# Altium PCB Board_USB_powered.PcbDoc
Units mm, origin at the board's own origin, x right, y up, seen from the top; angles counter-clockwise.
Board outline 55.5 x 44.32 mm, 4 copper layers (Top Layer, Layer 1, Layer 2, Bottom Layer), stack 1.586 mm thick; 45 components, 35 nets, 182 pads, 111 vias.
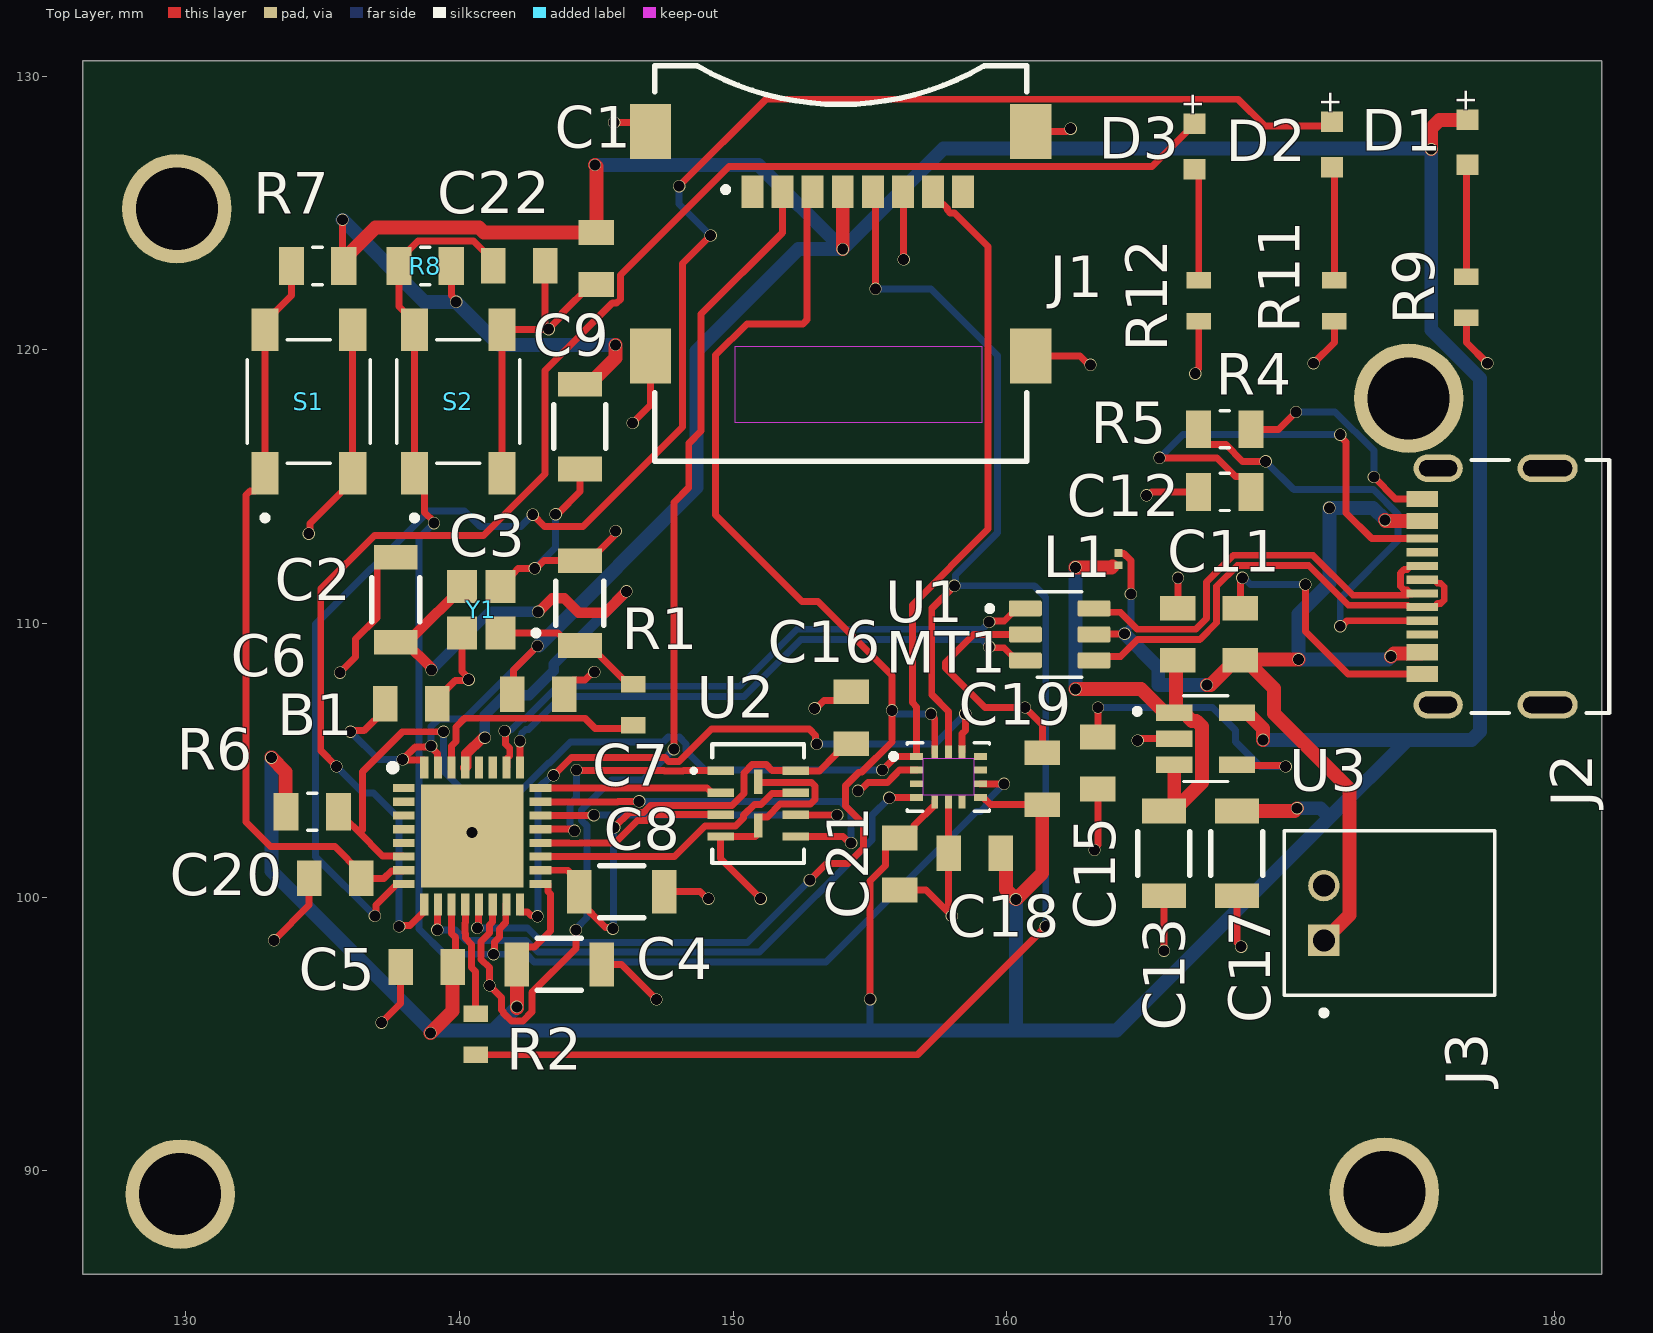
[diagram p0: Top Layer view]
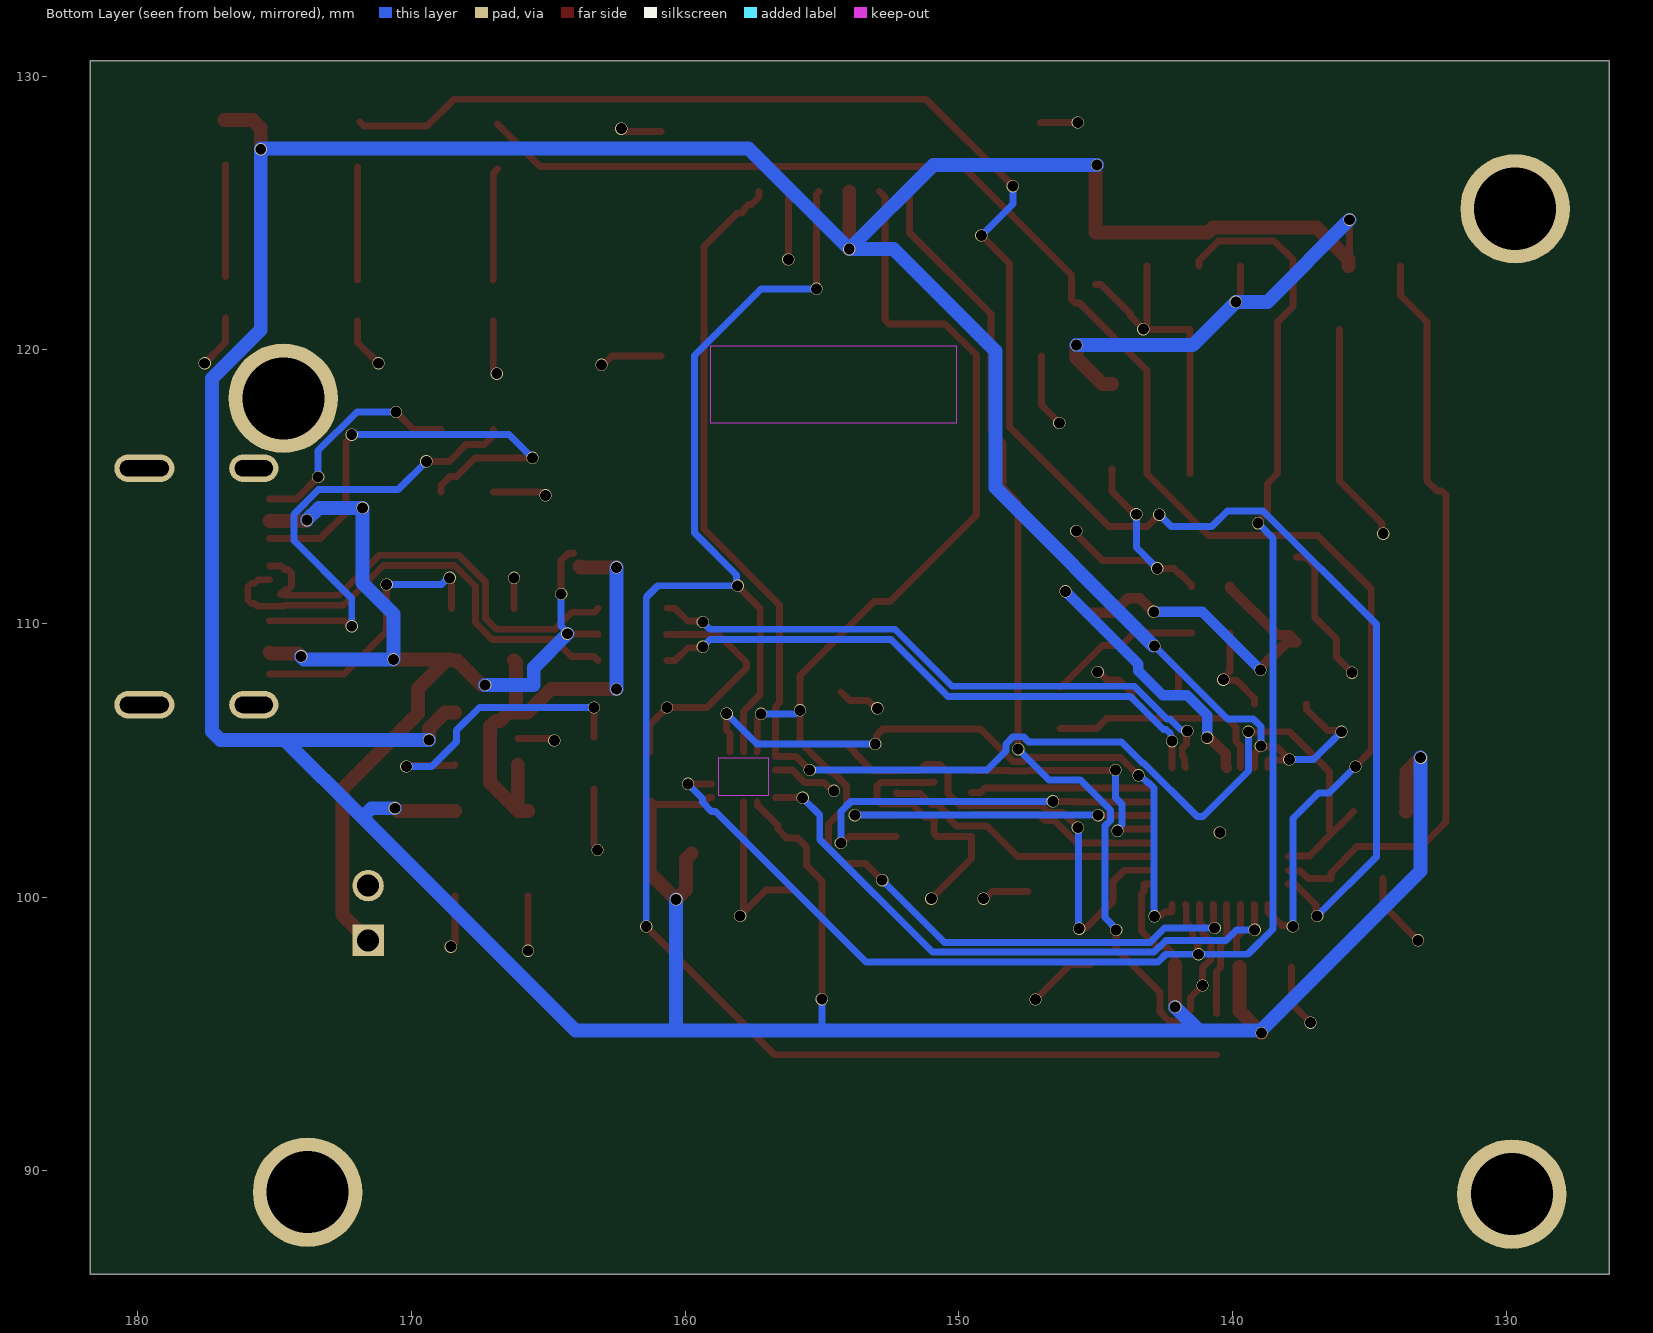
[diagram p1: Bottom Layer view, seen from below]
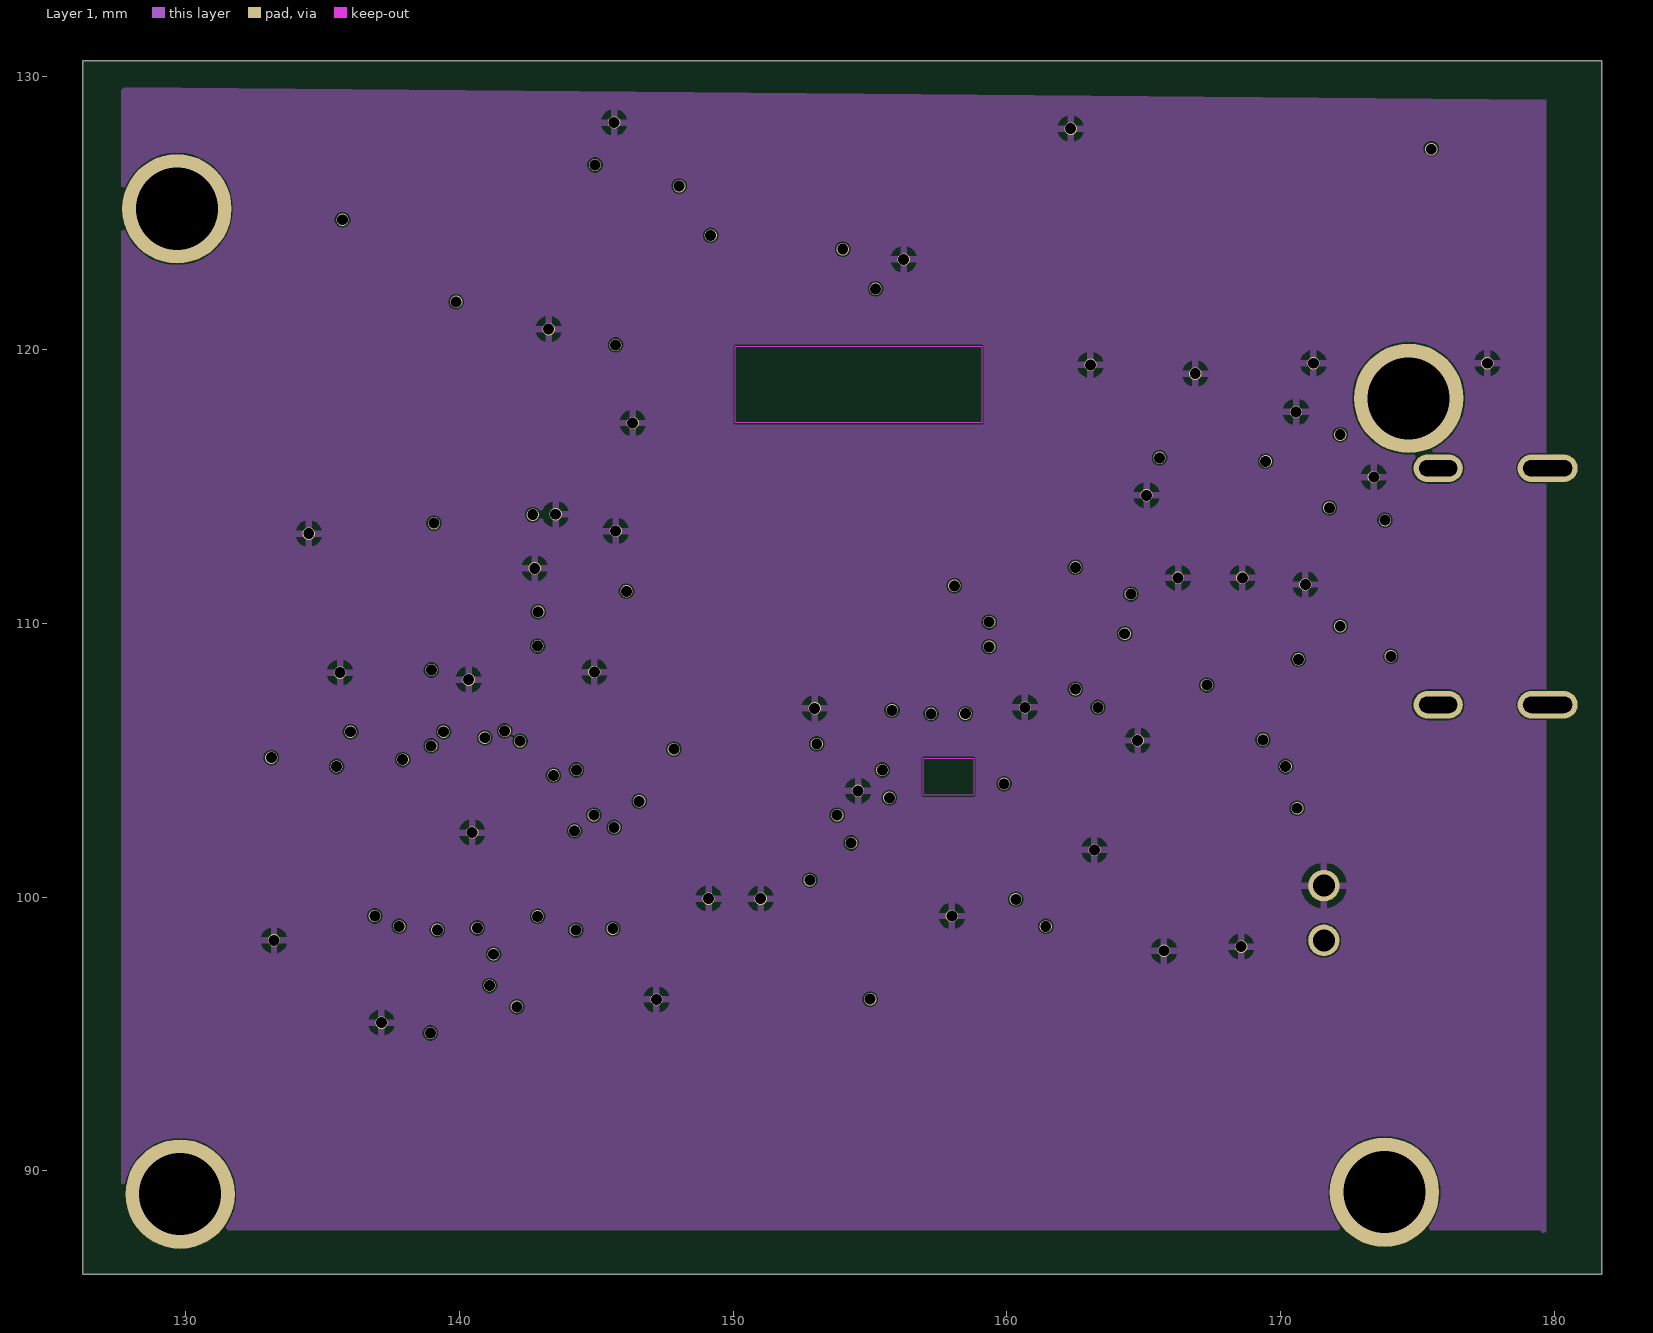
[diagram p2: Layer 1]
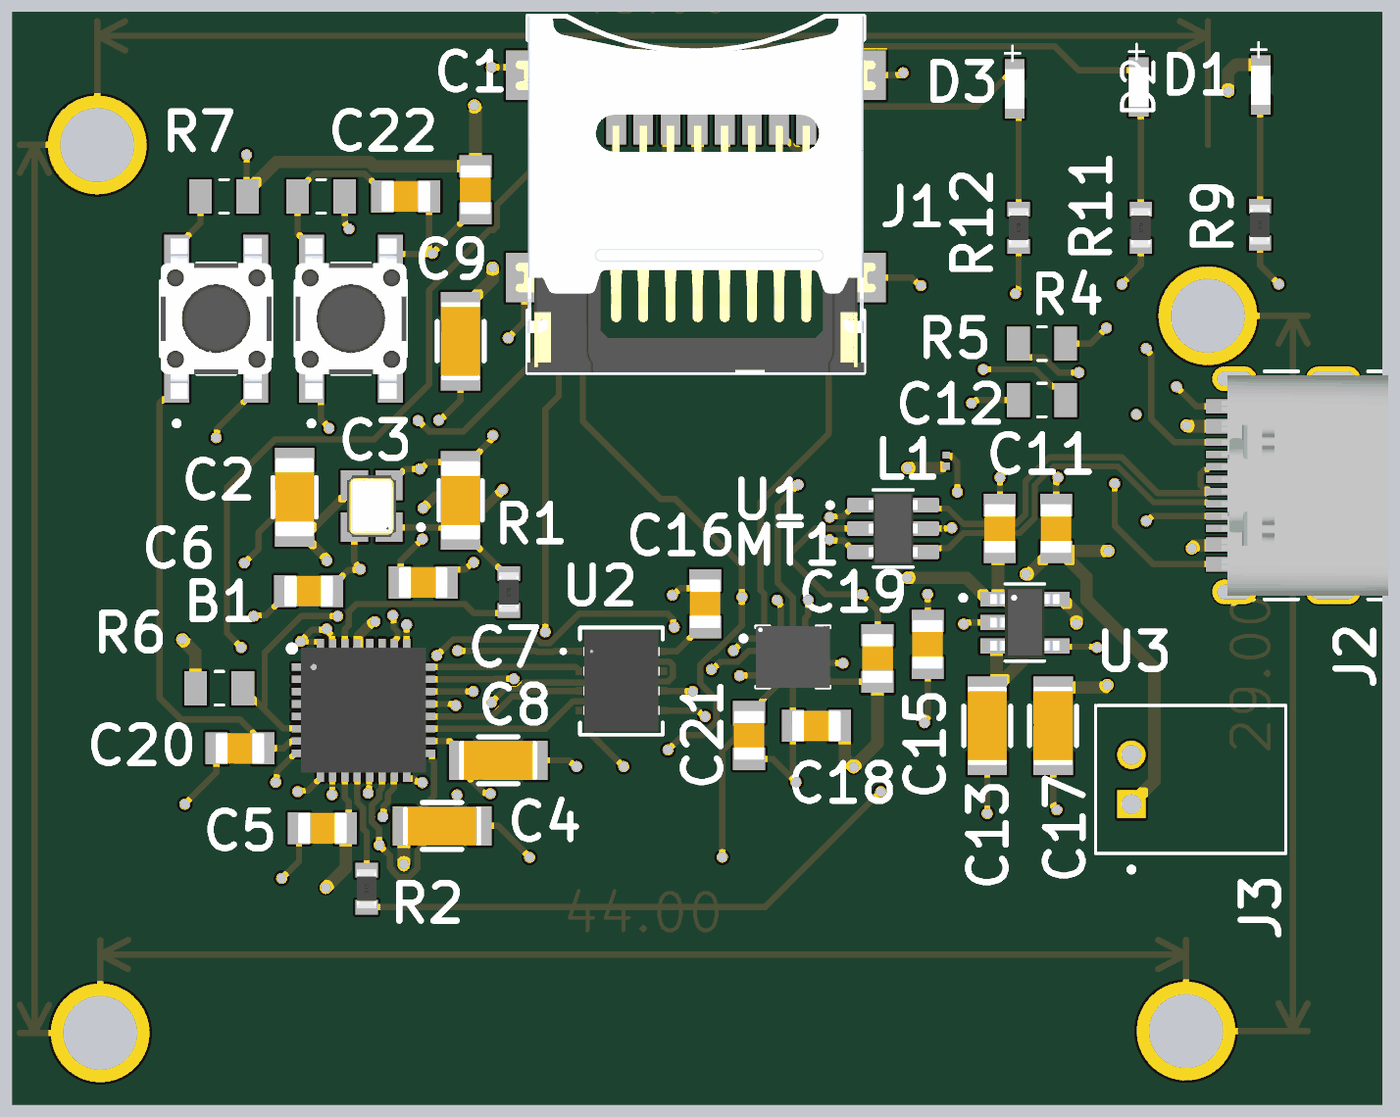
[diagram p3: 3D render of the assembled board from above, using the file's embedded part models]

## Layer stack, top to bottom
Top Solder: solder mask 0.0102, Solder Resist, Dk 3.5
Top Layer: signal copper 0.035
Dielectric 2: prepreg 0.2104, PP-006, Dk 4.4
Layer 1: signal copper 0.0152
Dielectric 1: dielectric 1.065, FR-4, Dk 4.4
Layer 2: signal copper 0.0152
Dielectric 3: prepreg 0.2104, PP-006, Dk 4.4
Bottom Layer: signal copper 0.035
Bottom Solder: solder mask 0.0102, Solder Resist, Dk 3.5

## Board outline
126.238,86.233 181.737,86.233 181.737,130.556 126.238,130.556

## Design rules (kind name [scope] priority, off if disabled: settings)
Clearance [All] p1: gap=0.05 ignorepadtopadclearanceinfootprint=TRUE
DiffPairsRouting [All] p1: maxlimit=0.254 minlimit=0.127 mostfreqgap=0.254 toplayer_maxgap=0.127 toplayer_prefgap=0.127 toplayer_minwidth=0.244 toplayer_maxwidth=0.244 toplayer_prefwidth=0.244 bottomlayer_maxgap=0.127 bottomlayer_prefgap=0.127 bottomlayer_minwidth=0.244 bottomlayer_maxwidth=0.244 bottomlayer_prefwidth=0.244 impedanceprofiledriven=TRUE impedanceprofileid={073ED901-ED6F-4E1C-9FA9-E3A75C1DBC98} impedanceprofilevalue=90.000000 maxuncoupledlength=12.7
PolygonConnect [All] p1: connectstyle=Relief reliefconductorwidth=0.254 reliefentries=4 polygonreliefangle="90 Angle" airgapwidth=0.254
RoutingVias [All] p1: holewidth=0.4 width=0.45 viastyle="Through Hole" minholewidth=0.4 minwidth=0.45 maxholewidth=0.6 maxwidth=1
SolderMaskExpansion [All] p1: expansion=0.102 istentingtop=FALSE
SupplyNets "Schematic Supply Nets_4" [InNet('+VBUS FILT')] p1: voltage=0.000
SupplyNets "Schematic Supply Nets_3" [InNet('+VBUS')] p2: voltage=0.000
SupplyNets "Schematic Supply Nets_2" [InNet('+VCC_SPI')] p3: voltage=0.000
SupplyNets "Schematic Supply Nets_1" [InNet('+3V3')] p4: voltage=0.000
SupplyNets "Schematic Supply Nets" [InNet('GND')] p5: voltage=0.000
Width [All] p1: maxlimit=0.508 minlimit=0.127 preferedwidth=0.254
29 further rules are at their usual default settings.

## Classes and differential pairs
differential pair USB_D: +USB_D_P -USB_D_N
differential pair MCU_USB_D: +MCU_USB_D_P -MCU_USB_D_N

## Components (designator, comment, footprint, x,y, rotation, side; value= is the part's Value field where it differs from the comment)
B1 "ESP32-C3" QFN50P500X500X90-33N-D 140.462,102.235 r0 top
C1 "885012207016" WCAP-CSGP_0805_L2W1.25H0.8_Reflow 144.998,123.333 r90 top value=100nF
C2 "885012008037" WCAP-CSGP_1206_L3.2W1.6H0.8 137.668,110.871 r90 top value=10pF
C3 "885012008037" WCAP-CSGP_1206_L3.2W1.6H0.8 144.399,110.744 r90 top value=10pF
C4 "885012208018" WCAP-CSGP_1206_L3.2W1.6H1.6 143.646,97.543 r180 top value=10µF
C5 "885012207016" WCAP-CSGP_0805_L2W1.25H0.8_Reflow 138.8,97.45 r0 top value=100nF
C6 "885012207016" WCAP-CSGP_0805_L2W1.25H0.8_Reflow 138.242,107.061 r180 top value=100nF
C7 "885012207016" WCAP-CSGP_0805_L2W1.25H0.8_Reflow 142.882,107.415 r180 top value=100nF
C8 "885012208018" WCAP-CSGP_1206_L3.2W1.6H1.6 145.923,100.203 r180 top value=10µF
C9 "885012208018" WCAP-CSGP_1206_L3.2W1.6H1.6 144.399,117.195 r90 top value=10µF
C11 "885012207016" WCAP-CSGP_0805_L2W1.25H0.8_Reflow 168.529,109.601 r270 top value=100nF
C12 "885012207016" WCAP-CSGP_0805_L2W1.25H0.8_Reflow 166.243,109.601 r270 top value=100nF
C13 "885012208018" WCAP-CSGP_1206_L3.2W1.6H1.6 165.735,101.6 r90 top value=10µF
C15 "885012207016" WCAP-CSGP_0805_L2W1.25H0.8_Reflow 163.322,104.902 r90 top value=100nF
C16 "885012207016" WCAP-CSGP_0805_L2W1.25H0.8_Reflow 154.305,106.553 r270 top value=100nF
C17 "885012208018" WCAP-CSGP_1206_L3.2W1.6H1.6 168.402,101.6 r270 top value=10µF
C18 "885012207016" WCAP-CSGP_0805_L2W1.25H0.8_Reflow 158.816,101.6 r0 top value=100nF
C19 "885012107012" WCAP-CSGP_0805_L2W1.25H1.25 161.29,104.333 r270 top value=2.2µF
C20 "885012207016" WCAP-CSGP_0805_L2W1.25H0.8_Reflow 135.458,100.692 r0 top value=100nF
C21 "885012007009" WCAP-CSGP_0805_L2W1.25H1.25 156.087,101.212 r90 top value=10nF
C22 "885012207016" WCAP-CSGP_0805_L2W1.25H0.8_Reflow 142.179,123.063 r180 top value=100nF
D1 "150060VS73220" WL-SMCC_0603_L1.6W0.8H0.2 176.825,127.575 r90 top
D2 "150060VS73220" WL-SMCC_0603_L1.6W0.8H0.2 171.875,127.5 r90 top
D3 "150060VS73220" WL-SMCC_0603_L1.6W0.8H0.2 166.85,127.425 r90 top
J1 "MEM2067-02-180-00-A_REVB" GCT_MEM2067-02-180-00-A_REVB 153.924,123.15 r180 top
J2 "2171790001" MOLEX_2171790001 178.6,111.35 r90 top
J3 "440055-2" TE_440055-2 171.577,98.425 r90 top
L1 "MHQ0402PSA2N2BT000" INDC0402X22N 164.075,112.35 r270 top value=2.2nH
MT1 "ICM-42605" XDCR_ICM-42605 157.861,104.394 r0 top
R1 "560112116043" WRIS-RSKS_0603_Reflow 146.35,107.025 r90 top value=22
R2 "560112116043" WRIS-RSKS_0603_Reflow 140.589,94.996 r90 top value=22
R4 "RC0805JR-075K1L" RESC2012X60N 167.955,117.094 r180 top value=5.1k
R5 "RC0805JR-075K1L" RESC2012X60N 167.955,114.808 r0 top value=5.1k
R6 "RC0805JR-075K1L" RESC2012X60N 134.62,103.124 r0 top value=5.1k
R7 "RC0805JR-075K1L" RESC2012X60N 134.813,123.063 r180 top value=5.1k
R8 "RC0805JR-075K1L" RESC2012X60N 138.745,123.063 r0 top value=5.1k
R9 "560112116014" WRIS-RSKS_0603_Reflow 176.784,121.92 r90 top value=1k
R11 "560112116014" WRIS-RSKS_0603_Reflow 171.958,121.793 r90 top value=1k
R12 "560112116014" WRIS-RSKS_0603_Reflow 167.005,121.793 r90 top value=1k
S1 "PTS_647_SM38_SMTR2_LFS" SW_PTS_647_SM38_SMTR2_LFS 134.493,118.11 r90 top
S2 "PTS_647_SM38_SMTR2_LFS" SW_PTS_647_SM38_SMTR2_LFS 139.954,118.11 r90 top
U1 "USBLC6-2SC6" SOT95P280X145-6N 161.925,109.601 r0 top
U2 "W25Q16JVUUIQ TR" USON8_4X3_UU_WIN 150.911,103.419 r0 top
U3 "SPX3819M5-L-3-3" SOT95P280X145-5N 167.259,105.791 r0 top
Y1 "FA-20H_16.0000MF12Z-AC3" XTAL_FA-20H_16.0000MF12Z-AC3 140.791,110.502 r180 top

## Footprints (in the part's own frame and the unit in brackets; to place one, negate y for a bottom-side part, rotate by r counter-clockwise, add the part's x,y. Pads: shape width x height; smd on the part's side, far side on the other; paste and mask are expansions set on the pad)
GCT_MEM2067-02-180-00-A_REVB [mm]
  rect 0.8x1.2 smd: 1(3.225,-2.625) 2(2.125,-2.625) 3(1.025,-2.625) 4(-0.075,-2.625) 5(-1.175,-2.625) 6(-2.275,-2.625) 7(-3.375,-2.625) 8(-4.475,-2.625)
  rect 1.5x2 smd: 9(-6.945,-4.825) 10(-6.945,3.375) 11(6.945,3.375) 12(6.945,-4.825)
  Keep-Out Layer region: 3.85,3.028 -5.155,3.028 -5.155,5.825 3.85,5.825
  silkscreen extent -6.8,-7.22 6.8,7.22, body extent -7.3,-7.22 7.3,7.22, height 1.8
INDC0402X22N [mm]
  rect 0.29x0.3 smd: 1(-0.222,0) 2(0.222,0)
MOLEX_2171790001 [mm]
  rect 0.59x1.15 smd mask+0.064: A1B12(-3.2,3.425) A4B9(-2.4,3.425) B1A12(3.2,3.425) B4A9(2.4,3.425)
  rect 0.298x1.15 smd mask+0.064: A5(-1.25,3.425) A6(-0.25,3.425) A7(0.25,3.425) A8(1.25,3.425) B5(1.75,3.425) B6(0.75,3.425) B7(-0.75,3.425) B8(-1.75,3.425)
  oval 1x2.2 hole 0.6 slot 1.8 at 90 deg mask+0.064: SH1(-4.32,-1.15) SH2(4.32,-1.15)
  oval 1x1.8 hole 0.6 slot 1.4 at 90 deg mask+0.064: SH3(-4.32,2.85) SH4(4.32,2.85)
  silkscreen extent -4.62,-3.4 4.62,1.63, body extent -4.47,-3.38 4.47,3.38, height 3.27
QFN50P500X500X90-33N-D [mm]
  rect 0.8x0.3 smd: 1(-2.5,1.75) 2(-2.5,1.25) 3(-2.5,0.75) 4(-2.5,0.25) 5(-2.5,-0.25) 6(-2.5,-0.75) 7(-2.5,-1.25) 8(-2.5,-1.75) 17(2.5,-1.75) 18(2.5,-1.25) 19(2.5,-0.75) 20(2.5,-0.25) 21(2.5,0.25) 22(2.5,0.75) 23(2.5,1.25) 24(2.5,1.75)
  rect 0.3x0.8 smd: 9(-1.75,-2.5) 10(-1.25,-2.5) 11(-0.75,-2.5) 12(-0.25,-2.5) 13(0.25,-2.5) 14(0.75,-2.5) 15(1.25,-2.5) 16(1.75,-2.5) 25(1.75,2.5) 26(1.25,2.5) 27(0.75,2.5) 28(0.25,2.5) 29(-0.25,2.5) 30(-0.75,2.5) 31(-1.25,2.5) 32(-1.75,2.5)
  rect 3.75x3.75 smd: 33(0,0)
  silkscreen extent -3.02,2.38 -2.77,2.62, body extent -2.53,-2.53 2.53,2.53, height 0.89
RESC2012X60N [mm]
  rect 0.92x1.38 smd: 1(-0.955,0) 2(0.955,0)
  silkscreen extent -0.17,-0.68 0.17,0.68
SOT95P280X145-5N [mm]
  rect 1.32x0.6 smd: 1(-1.15,0.95) 2(-1.15,0) 3(-1.15,-0.95) 4(1.15,-0.95) 5(1.15,0.95)
  silkscreen extent -2.6,-1.56 0.8,1.56, body extent -1.4,-1.45 1.4,1.45, height 1.45
SOT95P280X145-6N [mm]
  rrect25% 1.21x0.59 smd: 1(-1.255,0.95) 2(-1.255,0) 3(-1.255,-0.95) 4(1.255,-0.95) 5(1.255,0) 6(1.255,0.95)
  silkscreen extent -2.65,-1.57 0.81,1.57, body extent -1.4,-1.46 1.4,1.46, height 0.4
SW_PTS_647_SM38_SMTR2_LFS [mm]
  rect 1.55x1 smd: 1(-2.625,1.6) 2(2.625,1.6) 3(-2.625,-1.6) 4(2.625,-1.6)
  silkscreen extent -4.35,-2.25 2.25,2.25, body extent -3.25,-2.25 3.25,2.25, height 3.8
TE_440055-2 [mm]
  rect 1.15x1.15 / inner round 1.15 / far side rect 1.15x1.15 hole 0.8: 1(0,0)
  round 1.15 hole 0.8: 2(2,0)
  silkscreen extent -2.75,-6.25 4,1.45
USON8_4X3_UU_WIN [mil]
  rect 38x12 smd paste-19 mask-19: 1(-54,47.24) 2(-54,15.75) 3(-54,-15.75) 4(-54,-47.24) 5(54,-47.24) 6(54,-15.75) 7(54,15.75) 8(54,47.24)
  rect 12x35 smd paste+0 mask-17.5: 9(0,31.5) 10(0,-31.5)
  silkscreen extent -96,-86 66,86, body extent -61,-81 61,81, height 24
WCAP-CSGP_0805_L2W1.25H0.8_Reflow [mm] "Ceramic Capacitors, body 2x1.25mm"
  rect 0.9x1.3 smd: 1(-0.95,0) 2(0.95,0)
  body extent -1,-0.62 1,0.63, height 0.8
WCAP-CSGP_0805_L2W1.25H1.25 [mm] "Ceramic Capacitors, body 2x1.25mm"
  rect 0.9x1.3 smd: 1(-0.95,0) 2(0.95,0)
  body extent -1,-0.63 1,0.63, height 1.25
WCAP-CSGP_1206_L3.2W1.6H0.8 [mm] "Ceramic Capacitors, body 3.2x1.6mm"
  rect 0.9x1.6 smd: 1(-1.55,0) 2(1.55,0)
  silkscreen extent -0.8,-0.87 0.8,0.87, body extent -1.6,-0.8 1.6,0.8, height 0.8
WCAP-CSGP_1206_L3.2W1.6H1.6 [mm] "Ceramic Capacitors, body 3.2x1.6mm"
  rect 0.9x1.6 smd: 1(-1.55,0) 2(1.55,0)
  silkscreen extent -0.8,-0.95 0.8,0.95, body extent -1.6,-0.8 1.6,0.8, height 1.6
WL-SMCC_0603_L1.6W0.8H0.2 [mm] "SMD Mono-color Chip LED Compact, body 1.6x.8mm"
  rect 0.75x0.8 smd: 1(-0.825,0) 2(0.825,0)
  body extent -0.8,-0.4 0.8,0.4, height 0.19
WRIS-RSKS_0603_Reflow [mm] "Fixed Thick Film, body 1.60 x 0.80 mm"
  rect 0.6x0.9 smd: 1(-0.75,0) 2(0.75,0)
  body extent -0.8,-0.4 0.8,0.4, height 0.45
XDCR_ICM-42605 [mm]
  rect 0.475x0.25 smd paste-1 mask+0.05: 1(-1.162,0.75) 2(-1.162,0.25) 3(-1.162,-0.25) 4(-1.162,-0.75) 8(1.162,-0.75) 9(1.162,-0.25) 10(1.162,0.25) 11(1.162,0.75)
  rect 0.25x0.475 smd paste-1 mask+0.05: 5(-0.5,-0.913) 6(0,-0.913) 7(0.5,-0.913) 12(0.5,0.913) 13(0,0.913) 14(-0.5,0.913)
  Keep-Out Layer region: 0.925,-0.675 -0.925,-0.675 -0.925,0.675 0.925,0.675
  silkscreen extent -2.1,-1.25 1.5,1.25, body extent -1.5,-1.25 1.5,1.25, height 0.95
XTAL_FA-20H_16.0000MF12Z-AC3 [mm]
  rect 1.1x1.2 smd: 1(-0.7,0.85) 2(-0.7,-0.85) 3(0.7,-0.85) 4(0.7,0.85)
  silkscreen extent -2.1,0.75 -1.9,0.95, body extent -1,-1.25 1,1.25, height 0.55

## Part data
B1: library part CMP-628-000001-2, "Ultra-Low-Power SoC with RISC-V Single-Core CPU", Manufacturer_Name="Espressif Systems", Mouser Part Number=356-ESP32-C3, Datasheet Link=https://www.espressif.com/sites/default/files/documentation/esp32-c3_datasheet_en.pdf, Design Item ID=ESP32-C3, Geometry.Height=0.9mm, Manufacturer_Part_Number=ESP32-C3, Mouser Price/Stock=https://www.mouser.co.uk/ProductDetail/Espressif-Systems/ESP32-C3?qs=iLbezkQI%252BsiMXe7tMG%252Bo%2FA%3D%3D, Source=ESP32-C3.SchLib
C1 C5 C6 C7 C11 C12 C15 C16 C18 C20 C22: library part CMP-001-07966-1, "WCAP-CSGP Multilayer Ceramic Chip Capacitor, General Purpose, size 0805, X7R, 100nF, 10VDC", Capacitance Tolerance=+/-10%, Case/Package=0805, Insulation Resistance=5GO, Manufacturer="Wurth Elektronik", Operating Temperature Max=125°C, Operating Temperature Min=-55°C, Rated Voltage (DC)=10V, Category="Multilayer Ceramic Chip Capacitors", Ceramic Type=X7R, Component Type=Standard, ComponentLink1Description="Website Link", ComponentLink1URL=https://www.we-online.com/redexpert/article/885012207016?ad, ComponentLink2Description="Datasheet Link", ComponentLink2URL=https://www.we-online.com/redexpert/spec/885012207016?ad, Design Item ID=885012207016, Dissipation Factor=5%, Height=0.8mm, Length=2mm, Manufacturer Part Number=885012207016, Match Code=WCAP-CSGP, Mount="Surface Mount", Packaging="Tape and Reel", Pins=2, Source=WCAP-CSGP.SchLib, Technical Reference=X7R0805104K010DFCT10000, Width=1.25mm
C2 C3: library part CMP-001-09392-1, "WCAP-CSGP Multilayer Ceramic Chip Capacitor, General Purpose, size 1206, NP0, 10pF, 50VDC", Capacitance Tolerance=+/-5%, Case/Package=1206, Insulation Resistance=10GOhm, Manufacturer="Wurth Elektronik", Operating Temperature Max=125°C, Operating Temperature Min=-55°C, Rated Voltage (DC)=50V, Category="Multilayer Ceramic Chip Capacitors", Ceramic Type=NP0, Component Type=Standard, ComponentLink1Description="Website Link", ComponentLink1URL=https://www.we-online.com/redexpert/article/885012008037?ad, ComponentLink2Description="Datasheet Link", ComponentLink2URL=https://www.we-online.com/redexpert/spec/885012008037?ad, Design Item ID=885012008037, Height=0.8mm, Length=3.2mm, Manufacturer Part Number=885012008037, Match Code=WCAP-CSGP, Mount="Surface Mount", Packaging="Tape and Reel", Pins=2, Q Factor=600, Source=WCAP-CSGP.SchLib, Technical Reference=NP01206100J050DFCT10000, Width=1.6mm
C4 C8 C9 C13 C17: library part CMP-001-09916-1, "WCAP-CSGP Multilayer Ceramic Chip Capacitor, General Purpose, size 1206, X7R, 10uF, 10VDC", Capacitance Tolerance=+/-10%, Case/Package=1206, Insulation Resistance=0.01GOhm, Manufacturer="Wurth Elektronik", Operating Temperature Max=125°C, Operating Temperature Min=-55°C, Rated Voltage (DC)=10V, Category="Multilayer Ceramic Chip Capacitors", Ceramic Type=X7R, Component Type=Standard, ComponentLink1Description="Website Link", ComponentLink1URL=https://www.we-online.com/redexpert/article/885012208018?ad, ComponentLink2Description="Datasheet Link", ComponentLink2URL=https://www.we-online.com/redexpert/spec/885012208018?ad, Design Item ID=885012208018, Dissipation Factor=10%, Height=1.6mm, Length=3.2mm, Manufacturer Part Number=885012208018, Match Code=WCAP-CSGP, Mount="Surface Mount", Packaging="Tape and Reel", Pins=2, Source=WCAP-CSGP.SchLib, Technical Reference=X7R1206106K010DFCT10000, Width=1.6mm
C19: library part CMP-001-09534-1, "WCAP-CSGP Multilayer Ceramic Chip Capacitor, General Purpose, size 0805, X5R, 2.2uF, 16VDC", Capacitance Tolerance=+/-20%, Case/Package=0805, Insulation Resistance=0.05GOhm, Manufacturer="Wurth Elektronik", Operating Temperature Max=85°C, Operating Temperature Min=-55°C, Rated Voltage (DC)=16V, Category="Multilayer Ceramic Chip Capacitors", Ceramic Type=X5R, Component Type=Standard, ComponentLink1Description="Website Link", ComponentLink1URL=https://www.we-online.com/redexpert/article/885012107012?ad, ComponentLink2Description="Datasheet Link", ComponentLink2URL=https://www.we-online.com/redexpert/spec/885012107012?ad, Design Item ID=885012107012, Dissipation Factor=10%, Height=1.25mm, Length=2mm, Manufacturer Part Number=885012107012, Match Code=WCAP-CSGP, Mount="Surface Mount", Packaging="Tape and Reel", Pins=2, Source=WCAP-CSGP.SchLib, Technical Reference=X5R0805225M016DFCT10000, Width=1.25mm
C21: library part CMP-001-09275-1, "WCAP-CSGP Multilayer Ceramic Chip Capacitor, General Purpose, size 0805, NP0, 10nF, 10VDC", Capacitance Tolerance=+/-5%, Case/Package=0805, Insulation Resistance=10GOhm, Manufacturer="Wurth Elektronik", Operating Temperature Max=125°C, Operating Temperature Min=-55°C, Rated Voltage (DC)=10V, Category="Multilayer Ceramic Chip Capacitors", Ceramic Type=NP0, Component Type=Standard, ComponentLink1Description="Website Link", ComponentLink1URL=https://www.we-online.com/redexpert/article/885012007009?ad, ComponentLink2Description="Datasheet Link", ComponentLink2URL=https://www.we-online.com/redexpert/spec/885012007009?ad, Design Item ID=885012007009, Height=1.25mm, Length=2mm, Manufacturer Part Number=885012007009, Match Code=WCAP-CSGP, Mount="Surface Mount", Packaging="Tape and Reel", Pins=2, Q Factor=1000, Source=WCAP-CSGP.SchLib, Technical Reference=NP00805103J010DFCT10000, Width=1.25mm
D1 D2 D3: library part CMP-004-00631-1, "WL-SMCC Mono-color Chip LED Compact, size 0603, Bright Green, 2V, 120°", Case/Package=0603, Emitting Color="Bright Green", Forward Voltage=2V, Manufacturer="Wurth Elektronik", Operating Temperature Max=85°C, Operating Temperature Min=-40°C, Category="Signal LEDs", Chip Technology=AlInGaP, Component Type=Standard, ComponentLink1Description="Website Link", ComponentLink1URL=https://www.we-online.com/redexpert/article/150060VS73220?ad, ComponentLink2Description="Datasheet Link", ComponentLink2URL=https://www.we-online.com/redexpert/spec/150060VS73220?ad, Design Item ID=150060VS73220, Dominant Wavelength=573nm, Height=0.2mm, Length=1.6mm, Luminous Intensity=60mcd, Manufacturer Part Number=150060VS73220, Match Code=WL-SMCC, Mount="Surface Mount", Packaging="Tape and Reel", Peak Wavelength=575nm, Pins=2, Source=WL-SMCC.SchLib, Viewing Angle=120°, Width=0.8mm
J1: library part CMP-002-03438-2, "Micro SD Memory Card ConnectorSMT, Hinged, 1.80mm Profile", Case/Package=None, Availability=Unavailable, Component Type=Standard, Design Item ID=MEM2067-02-180-00-A_REVB, MP=MEM2067-02-180-00-A_REVB, Pins=12, Price=None, Source=MEM2067-02-180-00-A_REVB.SchLib
J2: library part CMP-002-03437-2, "USB Type C - Connector, Top-mount SMT, 16pos", Case/Package=None, Check_prices=https://www.snapeda.com/parts/217179-0001/Molex/view-part/?ref=eda, Component Type=Standard, Design Item ID=2171790001, MF=Molex, MP=217179-0001, Pins=16, SnapEDA_Link=https://www.snapeda.com/parts/217179-0001/Molex/view-part/?ref=snap, Source=2171790001.SchLib
J3: library part CMP-002-03439-1, "2.0MM,HDR,2POS,R/A", Case/Package=None, Centerline_Pitch="2 mm[.079 in]", Check_prices=https://www.snapeda.com/parts/440055-2/TE+Connectivity+AMP+Connectors/view-part/?ref=eda, Component Type=Standard, Design Item ID=440055-2, EU_RoHS_Compliance=Compliant, MF="TE Connectivity", MP=440055-2, Number_of_Positions=2, Pins=2, Product_Type=Connector, SnapEDA_Link=https://www.snapeda.com/parts/440055-2/TE+Connectivity+AMP+Connectors/view-part/?ref=snap, Source=440055-2.SchLib
L1: library part CMP-006-00905-1, "2.2 nH Shielded Multilayer Inductor 400 mA 400mOhm Max 01005 (0402 Metric)", Case/Package=None, Availability=Unavailable, Component Type=Standard, Design Item ID=MHQ0402PSA2N2BT000, MF="{'manufacturer': u'TDK Corporation'}", MP=MHQ0402PSA2N2BT000, Pins=2, Price=None, Source=MHQ0402PSA2N2BT000.SchLib
MT1: library part CMP-010-00024-1, Case/Package=None, Availability=Unavailable, Component Type=Standard, Design Item ID=ICM-42605, MP=ICM-42605, Pins=14, Price=None, Source=ICM-42605.SchLib
R1 R2: library part CMP-009-00537-1, "WRIS-RSKS Thick Film Resistor, size 0603, 22Ohm, 100mW", Case/Package=0603, Limiting Element Voltage=75V, Manufacturer="Wurth Elektronik", Operating Temperature Max=155°C, Operating Temperature Min=-55°C, Rated Power=100mW, Resistance Tolerance=+/-5%, Temperature Coefficient of Resistance Max=100ppm/°C, Temperature Coefficient of Resistance Min=-100ppm/°C, Category="Thick Film Resistors", Component Type=Standard, ComponentLink1Description="Website Link", ComponentLink1URL=https://www.we-online.com/redexpert/article/560112116043?ad, ComponentLink2Description="Datasheet Link", ComponentLink2URL=https://www.we-online.com/redexpert/spec/560112116043?ad, Design Item ID=560112116043, Height=0.45mm, Length=1.6mm, Manufacturer Part Number=560112116043, Match Code=WRIS-RSKS, Mount="Surface Mount", Packaging="Tape and Reel", Pins=2, Source=WRIS-RSKS.SchLib, Width=0.8mm
R4 R5 R6 R7 R8: library part CMP-009-00765-1, "RC0805 5,1K 5% 0,125W", Case/Package=None, Availability=Unavailable, Component Type=Standard, Design Item ID=RC0805JR-075K1L, MP=RC0805JR-075K1L, Pins=2, Price=None, Source=RC0805JR-075K1L.SchLib
R9 R11 R12: library part CMP-009-00508-1, "WRIS-RSKS Thick Film Resistor, size 0603, 1000Ohm, 100mW", Case/Package=0603, Limiting Element Voltage=75V, Manufacturer="Wurth Elektronik", Operating Temperature Max=155°C, Operating Temperature Min=-55°C, Rated Power=100mW, Resistance Tolerance=+/-1%, Temperature Coefficient of Resistance Max=100ppm/°C, Temperature Coefficient of Resistance Min=-100ppm/°C, Category="Thick Film Resistors", Component Type=Standard, ComponentLink1Description="Website Link", ComponentLink1URL=https://www.we-online.com/redexpert/article/560112116014?ad, ComponentLink2Description="Datasheet Link", ComponentLink2URL=https://www.we-online.com/redexpert/spec/560112116014?ad, Design Item ID=560112116014, Height=0.45mm, Length=1.6mm, Manufacturer Part Number=560112116014, Match Code=WRIS-RSKS, Mount="Surface Mount", Packaging="Tape and Reel", Pins=2, Source=WRIS-RSKS.SchLib, Width=0.8mm
S1 S2: library part CMP-011-00590-2, "Tactile Switch SPST-NO Top Actuated Surface Mount", Case/Package=None, Check_prices=https://www.snapeda.com/parts/PTS%20647%20SM38%20SMTR2%20LFS/C%2526K/view-part/?ref=eda, Component Type=Standard, Design Item ID=PTS_647_SM38_SMTR2_LFS, Digi-Key_Part_Number=PTS647SM38SMTR2LFSTR-ND, MF=C&K, MP="PTS 647 SM38 SMTR2 LFS", Pins=4, Purchase-URL="https://pricing.snapeda.com/search/part/PTS 647 SM38 SMTR2 LFS/?ref=eda", SnapEDA_Link=https://www.snapeda.com/parts/PTS%20647%20SM38%20SMTR2%20LFS/C%2526K/view-part/?ref=snap, Source=PTS_647_SM38_SMTR2_LFS.SchLib
U1: library part CMP-004-00696-1, "17V Clamp 5A (8/20Âµs) Ipp Tvs Diode Surface Mount SOT-23-6", Case/Package="SOT-23-6 STMicroelectronics", Availability="In Stock", Check_prices=https://www.snapeda.com/parts/USBLC6-2SC6/STMicroelectronics/view-part/?ref=eda, Component Type=Standard, Design Item ID=USBLC6-2SC6, MF=STMicroelectronics, MP=USBLC6-2SC6, Pins=6, Price=None, Purchase-URL=https://pricing.snapeda.com/search/part/USBLC6-2SC6/?ref=eda, SnapEDA_Link=https://www.snapeda.com/parts/USBLC6-2SC6/STMicroelectronics/view-part/?ref=snap, Source=USBLC6-2SC6.SchLib
U2: library part CMP-019-00050-1, "No Description Available", Mfr_Name=Winbond, Design Item ID="W25Q16JVUUIQ TR", RefDes=RefDes, Source=W25Q16JVUUIQTR.SchLib, Type=Type
U3: library part CMP-031-01210-1, "Linear Voltage Regulator IC Positive Fixed 1 Output 500mA SOT-23-5", Case/Package="SOT-23-5 Exar", Check_prices=https://www.snapeda.com/parts/SPX3819M5-L-3-3/TR/MaxLinear%252C+Inc./view-part/?ref=eda, Component Type=Standard, Design Item ID=SPX3819M5-L-3-3, MF="MaxLinear, Inc.", MP=SPX3819M5-L-3-3/TR, Pins=5, SnapEDA_Link=https://www.snapeda.com/parts/SPX3819M5-L-3-3/TR/MaxLinear%252C+Inc./view-part/?ref=snap, Source=SPX3819M5-L-3-3.SchLib
Y1: library part CMP-003-00337-1, "16 MHz Â±10ppm Crystal 9pF 80 Ohms 4-SMD, No Lead", Case/Package="NON STANDARD-4 EPSON", Availability="In Stock", Check_prices=https://www.snapeda.com/parts/FA-20H%2016.0000MF12Z-AC3/EPSON/view-part/?ref=eda, Component Type=Standard, Design Item ID=FA-20H_16.0000MF12Z-AC3, MF=EPSON, MP="FA-20H 16.0000MF12Z-AC3", Pins=4, Price=None, Purchase-URL="https://pricing.snapeda.com/search/part/FA-20H 16.0000MF12Z-AC3/?ref=eda", SnapEDA_Link=https://www.snapeda.com/parts/FA-20H%2016.0000MF12Z-AC3/EPSON/view-part/?ref=snap, Source=FA-20H_16.0000MF12Z-AC3.SchLib

## Free pads (board coordinates)
  round 4 hole 3: 1(129.675,125.15) 2(129.794,89.154) 5(173.79,89.225) 6(174.675,118.225)

## Via types
v1: diameter 0.45, hole 0.4, Top Layer to Bottom Layer, 111 vias

## Nets (pads, with @x,y where several pads share a name; then routed paths per layer and width w, separated by ;. In a path a pad name is that pad's centre, name@x,y a point inside that pad or via, vN(x,y) a via of type N, cw(c..) or ccw(c..) an arc to the next point about the centre after c; other vN are vias at no path point)
+3V3: B1.11 B1.17 B1.31 B1.32 C1.2 C4.2 C5.2 C6.2 C7.2 C9.2 C17.1 C18.2 C19.2 C21.2 D1.2 J1.4 MT1.5 MT1.8 R6.1 R7.1 R8.2 U3.5 | length 226.3
  Top Layer w0.254: v1(135.725,124.75) 135.725,123.106 R7.1 ; v1(136.017,106.045) 136.055,106.083 136.514,106.083 137.292,106.861 C6.2 ; B1.32 138.712,104.985 138.689,105.008 137.943,105.008 v1(137.922,105.029) 138.383,105.49 138.928,105.49 v1(138.965,105.527) ; v1@138.965,105.539 v1(138.965,105.527) ; B1.31 139.189,104.758 139.189,105.25 138.965,105.474 v1(138.965,105.527) ; R8.2 139.7,121.978 139.875,121.803 v1(139.875,121.75) ; B1.11 139.712,98.673 139.861,98.524 139.861,98.104 ; C7.2 141.972,107.455 141.972,108.297 v1(142.85,109.175) ; v1@142.096,95.954 v1@142.125,95.925 ; C4.2 142.096,97.861 142.419,98.184 142.736,98.184 143.325,98.773 143.325,100.122 143.235,100.212 143.235,100.462 143.212,100.485 B1.17 ; v1(155,96.275) 155,100.596 155.564,101.16 155.564,101.839 155.887,102.162 C21.2 156.287,102.162 156.61,102.485 156.61,102.622 157.361,103.373 MT1.5 ; MT1.8 159.132,103.644 159.393,103.383 C19.2
  Top Layer w0.508: v1(133.125,105.1) 133.649,104.576 133.649,103.14 R6.1 ; R7.1 135.768,123.293 136.936,124.461 140.711,124.461 140.889,124.283 C1.2 144.998,126.702 v1(144.95,126.75) ; v1(138.939,95.039) 139.75,95.85 C5.2 ; v1@142.096,95.954 v1(142.096,95.995) C4.2 ; C9.2 144.749,118.745 145.7,119.696 v1(145.7,120.175) ; J1.4 154,125.774 v1(154,123.675) ; C18.2 159.962,101.404 159.962,100.288 v1(160.325,99.925) 161.29,100.89 C19.2 ; C17.1 170.5,103.15 v1(170.6,103.25) ; U3.5 168.769,106.741 169.35,106.16 v1(169.35,105.75) ; v1(175.5,127.325) 175.5,128.102 175.798,128.4 D1.2
  Bottom Layer w0.254: v1(136.017,106.045) 137.033,105.029 v1(137.922,105.029) ; v1(138.965,105.527) 138.965,106.232 139.242,106.509 140.184,106.509 v1(142.85,109.175) 142.875,109.2 v1@142.9,109.2 ; 155,95.125 v1(155,96.275)
  Bottom Layer w0.508: v1(133.125,105.1) 133.125,100.95 138.95,95.125 141.226,95.125 ; v1(135.725,124.75) 138.725,121.75 v1(139.875,121.75) 141.45,120.175 v1(145.7,120.175) ; v1(142.096,95.995) 141.226,95.125 ; v1@142.9,109.2 148.661,114.961 148.661,119.961 152.375,123.675 v1(154,123.675) ; v1(144.95,126.75) 150.925,126.75 v1(154,123.675) ; v1(160.325,99.925) 160.325,95.125 ; v1(169.35,105.75) 174.625,105.75 ; v1(170.6,103.25) 171.45,103.25 171.787,102.912 ; 141.226,95.125 155,95.125 160.325,95.125 ; v1(154,123.675) 157.675,127.35 175.5,127.35 175.5,120.729 177.275,118.954 177.275,106.048 176.977,105.75 174.625,105.75 ; 160.325,95.125 164,95.125 171.787,102.912 ; 171.787,102.912 174.625,105.75
+VBUS: C11.2 J2.A4B9 J2.B4A9 J3.1 L1.1 U1.5 | length 38.8
  Top Layer w0.254: U1.5 163.192,109.613 164.288,109.613 v1(164.3,109.625) ; L1.1@164.07,112.572 L1.1 164.093,112.554 164.265,112.554 164.525,112.294 v1(164.525,111.075)
  Top Layer w0.508: v1(167.3,107.75) 167.428,107.75 168.329,108.651 C11.2 168.567,108.689 C11.2@168.767,108.689 ; v1(170.647,108.689) C11.2@168.767,108.689 ; J3.1 172.506,99.354 172.506,103.953 169.756,106.703 169.756,107.624 168.729,108.651 C11.2@168.767,108.689 ; v1(173.809,113.775) 173.834,113.75 J2.B4A9 ; v1(174.025,108.8) 174.134,108.909 175.134,108.909 J2.A4B9
  Bottom Layer w0.254: v1(164.3,109.625) 164.3,109.678 164.525,109.903 v1(164.525,111.075)
  Bottom Layer w0.508: v1(164.3,109.625) 165.525,108.4 165.525,107.75 v1(167.3,107.75) ; v1(173.809,113.775) 173.809,113.791 173.375,114.225 v1(171.775,114.225) 171.775,111.481 170.647,110.353 v1(170.647,108.689) 173.914,108.689 v1(174.025,108.8)
"+VBUS FILT": C12.2 C13.2 L1.2 U3.1 U3.3 | length 18.3
  Top Layer w0.508: v1(162.5,107.6) 164.89,107.6 165.749,106.741 U3.1 U3.1@166.13,106.741 ; v1(162.5,112.05) 163.825,112.05 163.85,112.075 ; C13.2 166.085,103.15 167.123,104.188 167.123,106.238 166.916,106.445 166.765,106.445 166.469,106.741 U3.1@166.13,106.741 ; C13.2@166.109,103.346 U3.3 ; C12.2 166.176,108.584 166.176,106.787 U3.1@166.13,106.741
  Bottom Layer w0.508: v1(162.5,107.6) v1(162.5,112.05)
+VCC_SPI: B1.18 C8.2 C16.2 U2.8 | length 18.2
  Top Layer w0.254: B1.18 143.941,100.985 144.373,100.553 C8.2 144.373,99.853 145.338,98.888 145.562,98.888 v1(145.6,98.85) ; v1(145.65,102.55) 146.203,103.103 146.729,103.103 146.974,103.348 149.954,103.348 150.39,103.785 150.39,104.546 150.685,104.841 151.208,104.841 151.419,104.63 152.272,104.63 U2.8 153.146,104.619 153.782,105.255 153.782,105.28 154.105,105.603 C16.2
  Bottom Layer w0.254: v1(145.6,98.85) 145.625,98.875 145.625,102.525 v1(145.65,102.55)
ACCEL_INT: B1.10 MT1.4 | length 21.6
  Top Layer w0.254: v1(139.192,98.806) 139.202,98.816 139.202,99.725 B1.10 ; v1(155.702,103.632) 155.712,103.642 156.697,103.642 MT1.4
  Bottom Layer w0.254: v1(139.192,98.806) 139.85,98.806 140.233,98.423 142.432,98.423 142.861,97.994 150.957,97.994 155.078,102.115 155.078,103.008 v1(155.702,103.632)
"FSPI Q": B1.6 J1.7 MT1.1 R6.2 | length 53.2
  Top Layer w0.254: R6.2 135.908,102.791 136.251,102.448 136.356,102.448 136.461,102.448 136.461,104.584 137.922,106.045 v1(139.417,106.045) ; 136.304,102.395 137.191,101.508 137.939,101.508 B1.6 ; v1(155.448,104.648) 155.944,105.144 MT1.1 156.699,106.953 156.543,107.108 156.543,110.682 159.306,113.445 159.306,123.768 158.076,124.998 157.926,124.998 157.822,125.102 157.822,125.153 157.673,125.302 157.572,125.302 157.299,125.575 J1.7
  Bottom Layer w0.254: v1(139.417,106.045) 139.417,104.608 141.078,102.947 141.288,102.947 143.245,104.904 143.295,104.904 144.054,105.664 147.443,105.664 147.641,105.862 148.015,105.862 148.28,105.597 148.28,105.339 148.971,104.648 v1(155.448,104.648)
FSPI_CLK: J1.5 MT1.13 R2.1 | length 63.1
  Top Layer w0.254: R2.1 156.73,94.246 v1(161.417,98.933) ; J1.5 155.2,125.674 v1(155.2,122.225) ; MT1.13 157.861,106.792 157.251,107.402 157.251,110.551 v1(158.075,111.375)
  Bottom Layer w0.254: v1(155.2,122.225) 157.226,122.225 159.66,119.791 159.66,113.314 158.113,111.767 158.113,111.413 v1@158.079,111.379 ; v1(158.075,111.375) v1@158.079,111.379 ; v1(161.417,98.933) 161.417,110.958 160.996,111.379 v1@158.079,111.379
FSPI_D: B1.13 J1.3 MT1.14 | length 50.3
  Top Layer w0.254: v1(140.65,98.875) 140.65,98.928 140.689,98.967 140.689,99.712 B1.13 ; v1(152.8,100.625) 153.403,101.228 154.191,101.228 154.757,101.794 154.757,102.676 154.107,103.326 154.107,104.073 154.6,104.566 154.689,104.566 155.8,105.677 v1(155.8,106.825) 155.8,108.105 153.103,110.802 152.506,110.802 149.35,113.958 149.35,119.802 150.496,120.948 152.551,120.948 152.7,121.097 152.7,125.576 J1.3 ; v1(157.225,106.7) 157.225,106.647 157.361,106.511 MT1.14
  Bottom Layer w0.254: v1(140.65,98.875) 142.481,98.875 143.008,98.348 150.523,98.348 v1(152.8,100.625) ; v1(155.8,106.825) 155.853,106.825 155.978,106.7 v1(157.225,106.7)
FSPI_NCS: B1.16 MT1.12 | length 24.6
  Top Layer w0.254: B1.16 142.212,99.485 142.235,99.462 142.485,99.462 142.609,99.338 142.812,99.338 v1(142.85,99.3) ; v1(143.432,104.452) 143.437,104.452 144.085,105.1 147.499,105.1 147.641,104.958 148.015,104.958 149.207,106.15 152.776,106.15 153.012,105.914 153.012,105.638 v1(153.05,105.6) ; MT1.12 158.361,105.972 158.48,106.092 v1(158.48,106.705)
  Bottom Layer w0.254: v1(142.85,99.3) 142.863,99.313 142.863,103.985 143.042,104.165 143.091,104.165 143.379,104.452 v1(143.432,104.452) ; v1(153.05,105.6) 157.375,105.6 v1(158.48,106.705)
FSPI_NCS2: B1.14 J1.2 | length 40.4
  Top Layer w0.254: B1.14 141.212,99.094 141.102,98.984 141.102,98.688 140.792,98.378 140.792,97.73 141.097,97.425 v1(141.097,96.774) 141.536,96.335 141.536,95.875 141.615,95.796 141.615,95.755 141.897,95.473 141.938,95.473 142.312,95.473 142.64,95.801 142.64,96.516 144.25,98.127 v1(144.25,98.8) ; v1(147.828,105.41) 147.828,114.427 148.375,114.974 148.375,116.575 148.825,117.025 148.825,121.3 151.799,124.274 J1.2
  Bottom Layer w0.254: v1(144.25,98.8) 144.25,98.849 144.654,99.253 144.654,102.611 144.455,102.81 144.455,103.184 145.549,104.278 146.696,104.278 v1(147.828,105.41)
GND: B1.33 C1.1 C2.2 C3.2 C4.1 C5.1 C6.1 C7.1 C8.1 C9.1 C11.1 C12.1 C13.1 C15.1 C16.1 C17.2 C18.1 C19.1 C20.1 C21.1 C22.1 J1.6 J1.9 J1.10 J1.11 J1.12 J2.A1B12 J2.B1A12 J3.2 MT1.2 MT1.6 R4.1 R5.1 R9.1 R11.1 R12.1 S1.3 S1.4 S2.3 S2.4 U1.2 U2.4 U2.9 U2.10 U3.2 Y1.2 Y1.4 | length 124.5
  Top Layer w0.254: v1(133.223,98.425) 134.508,99.71 C20.1 ; v1(134.493,113.284) 134.531,113.322 134.531,113.648 136.093,115.21 S1.3 S1.4 ; v1(135.636,108.204) 136.207,108.775 136.207,109.431 136.995,110.219 136.995,112.098 137.318,112.421 C2.2 ; v1(137.149,95.418) 137.85,96.119 C5.1 ; C6.1 139.192,107.261 139.843,107.912 140.297,107.912 v1(140.335,107.95) 140.335,108.003 140.091,108.247 Y1.4 ; B1.33 v1(140.462,102.362) ; Y1.2 141.491,111.402 141.914,111.825 141.964,111.825 142.142,112.003 142.737,112.003 v1(142.748,112.014) 142.801,112.014 143.081,112.294 C3.2 144.749,112.294 145.667,113.212 145.667,113.338 v1(145.704,113.376) ; S2.3 S2.4 v1@143.118,120.735 ; v1@143.129,120.83 C22.1 ; v1(143.256,120.754) 143.731,121.229 143.731,121.316 144.798,122.383 C1.1 ; v1(143.51,113.99) 143.548,114.028 143.613,114.028 144.399,114.814 C9.1 ; C7.1@143.675,107.252 143.675,107.458 144.155,107.938 144.585,107.938 144.872,108.225 v1(144.925,108.225) ; C4.1 145.916,97.543 v1(147.193,96.266) ; v1(145.65,128.3) J1.12@147.01,128.3 ; v1(146.325,117.325) 146.979,117.979 J1.11 ; C8.1 148.791,100.203 149.045,99.949 v1(149.098,99.949) ; U2.9 150.932,104.198 152.859,104.198 152.992,104.066 152.992,103.573 152.818,103.398 151.706,103.398 151.244,102.937 150.937,102.937 150.911,102.911 U2.10 150.911,102.327 150.803,102.219 U2.4 149.54,101.412 v1(151.003,99.949) ; v1(152.975,106.9) 153.028,106.9 153.308,107.18 153.982,107.18 C16.1 ; v1(154.559,103.886) 154.612,103.886 154.918,104.192 155.631,104.192 155.9,104.461 155.9,104.464 156.08,104.644 MT1.2 ; C21.1 157.04,100.262 v1(157.988,99.314) 157.988,99.367 157.866,99.489 C18.1 157.861,101.605 MT1.6 ; J1.6 156.225,125.749 v1(156.225,123.3) ; U1.2 158.776,109.601 157.755,108.58 157.755,108.37 159.191,106.934 v1(160.655,106.934) 161.29,106.299 C19.1 ; J1.10 162.672,119.775 162.997,119.45 v1(163.05,119.45) ; J1.9 162.172,127.975 162.272,128.075 v1(162.325,128.075) ; v1(163.195,101.727) 163.195,101.78 163.322,101.907 C15.1 ; v1(164.775,105.725) 164.828,105.725 164.894,105.791 U3.2 ; v1(165.1,114.681) 165.153,114.681 165.28,114.808 R5.1 ; v1(165.735,98.044) C13.1 ; C12.1 166.25,110.558 v1(166.25,111.666) ; v1(166.878,119.126) 166.878,119.179 167.005,119.306 R12.1 ; C17.2 168.402,98.347 v1(168.555,98.194) ; C11.1 168.529,111.546 168.6,111.617 v1(168.6,111.67) ; R4.1 169.926,117.094 v1(170.561,117.729) ; 170.133,117.3 v1(170.561,117.729) ; v1(170.9,111.425) 170.9,109.7 172.45,108.15 J2.A1B12 ; v1(171.196,119.507) 171.958,120.269 R11.1 ; v1(173.4,115.35) 174.2,114.55 J2.B1A12 ; R9.1 176.784,120.269 v1(177.546,119.507)
  Bottom Layer w0.254: v1(142.748,112.014) 143.51,112.776 v1(143.51,113.99) ; v1(168.6,111.67) 168.653,111.67 168.898,111.425 v1(170.9,111.425) ; v1(170.561,117.729) 171.985,117.729 173.4,116.314 v1(173.4,115.35)
"INT GYR GPIO9": B1.15 C22.2 MT1.9 R8.1 S2.1 S2.2 | length 57
  Top Layer w0.254: v1(139.065,113.665) 139.065,113.718 138.727,114.056 138.727,115.112 S2.1 S2.2 138.354,121.01 137.79,121.574 R8.1 137.79,123.293 138.477,123.98 140.512,123.98 141.229,123.263 C22.2 ; v1(141.244,97.917) 141.282,97.955 141.282,98.367 141.456,98.541 141.456,98.837 141.689,99.07 141.689,99.712 B1.15 ; MT1.9 159.025,104.142 159.891,104.142 v1(159.893,104.14)
  Bottom Layer w0.254: v1(139.065,113.665) 138.513,113.113 138.513,98.846 139.442,97.917 v1(141.244,97.917) 142.438,97.917 142.715,97.64 153.393,97.64 158.891,103.138 159.027,103.138 159.367,103.478 159.367,103.614 v1(159.893,104.14)
"LED A": B1.8 D2.2 | length 65.9
  Top Layer w0.254: v1(136.906,99.314) 136.944,99.352 136.944,99.717 137.712,100.485 B1.8 ; v1(142.675,113.975) 143.112,113.538 144.513,113.538 148.15,117.175 148.15,123.15 v1(149.175,124.175) ; v1(148.025,125.975) 151.202,129.152 168.447,129.152 169.424,128.175 171.725,128.175 D2.2
  Bottom Layer w0.254: v1(136.906,99.314) 134.747,101.473 134.747,109.986 138.878,114.117 140.179,114.117 140.758,113.538 142.238,113.538 v1(142.675,113.975) ; v1(148.025,125.975) 148.025,125.325 v1(149.175,124.175)
"LED B": B1.9 D3.2 | length 56.8
  Top Layer w0.254: v1(135.509,104.775) 134.93,105.354 134.93,111.254 136.889,113.213 140.878,113.213 143.125,115.46 143.125,119.25 145.581,121.706 145.742,121.706 145.875,121.839 145.875,122.725 149.85,126.7 165.3,126.7 D3.2 ; v1(137.795,98.933) 137.833,98.971 138.198,98.971 138.712,99.485 B1.9
  Bottom Layer w0.254: v1(135.509,104.775) 136.48,103.804 136.861,103.804 137.795,102.87 v1(137.795,98.933)
MCU_FSPICLK: B1.12 R2.2 | length 4.2
  Top Layer w0.254: B1.12 140.215,99.732 140.215,99.08 140.198,99.062 140.198,98.688 140.215,98.67 140.215,98.503 140.438,98.28 140.438,97.436 140.589,97.285 R2.2
MCU_USB_D_N: B1.25 U1.3 | length 21.4
  Top Layer w0.244: v1(142.211,105.7) 142.211,104.736 B1.25 ; v1(159.35,109.149) 159.389,109.11 159.901,109.11 160.36,108.651 U1.3
  Bottom Layer w0.244: v1(142.211,105.7) 142.25,105.74 142.25,105.957 142.419,106.126 142.524,106.126 143.73,107.332 150.39,107.332 152.473,109.416 159.083,109.416 v1(159.35,109.149)
MCU_USB_D_P: B1.26 U1.1 | length 22.3
  Top Layer w0.244: v1(141.65,106.075) 141.678,106.047 141.678,105.593 141.84,105.432 141.84,105.169 141.74,105.069 141.74,104.763 B1.26 ; v1(159.35,110.053) 159.389,110.092 159.901,110.092 160.36,110.551 U1.1
  Bottom Layer w0.244: v1(141.65,106.075) 141.689,106.114 141.883,106.114 142.265,106.497 142.371,106.497 143.577,107.703 150.236,107.703 152.32,109.786 159.083,109.786 v1(159.35,110.053)
MCU_XTALN: B1.29 C2.1 Y1.3 | length 23.3
  Top Layer w0.381: v1(138.975,108.3) 138.962,108.313 138.962,108.377 138.018,109.321 C2.1 137.928,109.581 138.37,109.581 140.091,111.302 Y1.3 ; B1.29 140.253,104.776 140.253,105.236 140.828,105.812 140.912,105.812 v1(140.925,105.825) ; v1(142.875,110.425) 142.894,110.425 143.394,110.925 143.834,110.925 144.359,110.4 145.325,110.4 v1(146.1,111.175)
  Bottom Layer w0.381: v1(138.975,108.3) 141.1,110.425 v1(142.875,110.425) ; v1(140.925,105.825) 140.925,106.642 141.661,107.378 142.542,107.378 143.445,108.281 143.445,108.52 v1(146.1,111.175)
MCU_XTALP: B1.30 R1.1 | length 8.3
  Top Layer w0.254: B1.30 139.712,105.527 139.869,105.684 139.869,106.225 140.182,106.538 144.58,106.538 144.946,106.172 R1.1@146.304,106.172
NetB1_7: B1.7 C20.2 R7.2 S1.1 S1.2 | length 27.9
  Top Layer w0.254: R7.2 133.858,121.975 132.893,121.01 S1.2 S1.1 132.893,115.21 132.52,114.837 132.356,114.837 132.207,114.688 132.207,102.743 133.096,101.854 135.446,101.854 136.408,100.892 C20.2 137.239,100.692 137.509,100.962 137.939,100.962 B1.7
NetC3_1: C3.1 R1.2 Y1.1 | length 5.6
  Top Layer w0.254: Y1.1 143.591,109.652 144.049,109.194 C3.1 144.749,109.194 145.71,108.233 146.212,107.731 146.259,107.684 146.264,107.679 146.277,107.673 R1.2@146.304,107.672
NetC15_2: C15.2 U3.4 | length 10.9
  Top Layer w0.254: C15.2 v1(163.322,106.934) ; U3.4 168.442,104.808 170.147,104.808 v1(170.18,104.775)
  Bottom Layer w0.254: v1(163.322,106.934) 167.513,106.934 168.348,106.099 168.348,105.68 169.253,104.775 v1(170.18,104.775)
NetD1_1: D1.1 R9.2 | length 4.1
  Top Layer w0.254: R9.2 D1.1@176.784,126.75
NetD2_1: D2.1 R11.2 | length 4.1
  Top Layer w0.254: R11.2 D2.1@171.958,126.675
NetD3_1: D3.1 R12.2 | length 4.1
  Top Layer w0.254: D3.1 167.005,126.445 R12.2
NetJ2_A5: J2.A5 R4.2 | length 16.8
  Top Layer w0.254: R4.2 167,116.864 167.333,116.531 168.002,116.531 168.608,115.925 v1(169.45,115.925) ; v1(172.175,109.9) 172.228,109.9 172.428,110.1 J2.A5
  Bottom Layer w0.254: v1(169.45,115.925) 170.477,114.898 173.382,114.898 174.29,113.991 174.29,113.029 172.175,110.915 v1(172.175,109.9)
NetJ2_B5: J2.B5 R5.2 | length 17.1
  Top Layer w0.254: v1(165.575,116.05) 167.668,116.05 168.347,115.371 168.577,115.371 168.91,115.038 R5.2 ; v1(172.175,116.9) 172.175,116.847 172.387,116.635 172.387,114.038 173.325,113.1 J2.B5
  Bottom Layer w0.254: v1(165.575,116.05) 166.425,116.9 v1(172.175,116.9)
"SPI CLK": B1.22 U2.6 | length 12.4
  Top Layer w0.254: B1.22 142.968,102.991 144.901,102.991 v1(144.907,102.997) ; U2.6 152.294,103.008 153.786,103.008 v1(153.797,102.997)
  Bottom Layer w0.254: v1(144.907,102.997) v1(153.797,102.997)
"SPI DI": B1.23 U2.5 | length 14.8
  Top Layer w0.254: B1.23 145.776,103.485 145.796,103.505 v1(146.562,103.505) ; U2.5 154.014,102.219 154.252,101.981 v1(154.305,101.981)
  Bottom Layer w0.254: v1(146.562,103.505) 153.928,103.505 154.305,103.128 v1(154.305,101.981)
"SPI DO": B1.24 U2.2 | length 6.6
  Top Layer w0.254: B1.24 149.043,103.985 149.209,103.819 U2.2
"SPI NCS": B1.21 U2.1 | length 9
  Top Layer w0.254: B1.21 144.088,102.485 144.149,102.423 v1(144.202,102.423) ; v1(144.272,104.648) 144.286,104.634 147.465,104.634 147.494,104.604 148.162,104.604 148.191,104.634 149.525,104.634 U2.1
  Bottom Layer w0.254: v1(144.202,102.423) 144.202,102.476 144.035,102.643 144.035,103.396 144.272,103.633 v1(144.272,104.648)
"SPI NHLD": B1.19 U2.7 | length 10.3
  Top Layer w0.254: B1.19 147.849,101.485 148.963,102.598 150.075,102.598 150.37,102.893 150.37,102.996 150.769,103.395 151.02,103.395 151.419,103.794 152.257,103.794 U2.7
"SPI NWP": B1.20 U2.3 | length 7
  Top Layer w0.254: B1.20 144.001,101.985 144.015,101.971 144.389,101.971 144.403,101.985 145.681,101.985 146.495,102.799 146.855,102.799 147.075,103.019 U2.3
USB_D_N: J2.A7 J2.B7 U1.4 | length 17.1
  Top Layer w0.244: U1.4 163.325,108.796 164.151,108.796 164.771,109.416 165.336,109.416 165.338,109.416 167.046,109.416 167.657,110.027 167.657,111.359 168.415,112.117 171.024,112.117 172.476,110.665 174.63,110.665 174.668,110.627 175.628,110.627 175.73,110.729 175.842,110.729 175.972,110.859 175.972,111.341 175.842,111.471 175.73,111.471 175.601,111.6 J2.A7
USB_D_P: J2.A6 J2.B6 U1.6 | length 16.3
  Top Layer w0.244: U1.6 163.325,110.406 164.151,110.406 164.771,109.786 165.336,109.786 165.338,109.786 166.892,109.786 167.286,110.18 167.286,111.513 168.261,112.488 171.177,112.488 172.63,111.035 174.63,111.035 174.668,111.073 174.776,111.073 174.62,111.229 174.508,111.229 174.378,111.359 174.378,111.841 174.508,111.971 174.62,111.971 174.749,112.1 J2.B6
pads on no net: B1.1 B1.2 B1.3 B1.4 B1.5 B1.27 B1.28 J1.1 J1.8 J2.A8 J2.B8 J2.SH1 J2.SH2 J2.SH3 J2.SH4 MT1.3 MT1.7 MT1.10 MT1.11

## Polygon pours and split planes (outlines as drawn)
GND on Layer 1 "GND" (solid, remove dead copper, pour order 0): 127.575,129.6 127.65,129.525 127.65,87.825 179.475,87.825 179.65,87.65 179.7,87.7 179.7,129.125

## Dimensions
173.79,89.225 to 174.675,118.225 on Top Layer
129.794,89.154 to 173.79,89.225 on Top Layer
129.675,125.15 to 129.794,89.154 on Top Layer
129.675,125.15 to 174.675,118.225 on Top Layer

## Text inside footprints (layer, text, board x,y; h text height)
D1: Top Overlay "+" at 176.425,129.575 h0.8 r270
D2: Top Overlay "+" at 171.475,129.5 h0.8 r270
D3: Top Overlay "+" at 166.45,129.425 h0.8 r270
J2: Top 3D Body "PTH Slot 0.6 +/-0.05 X 1.4 +/-0.05" at 180.759,86.585 h0.5 r90; Top 3D Body "PTH Slot 0.6 +/-0.05 X 1.8 +/-0.05" at 181.525,89.85 h0.5 r90